# EAGLE board Pacman2-OSH-panels (EAGLE 9.2.2)
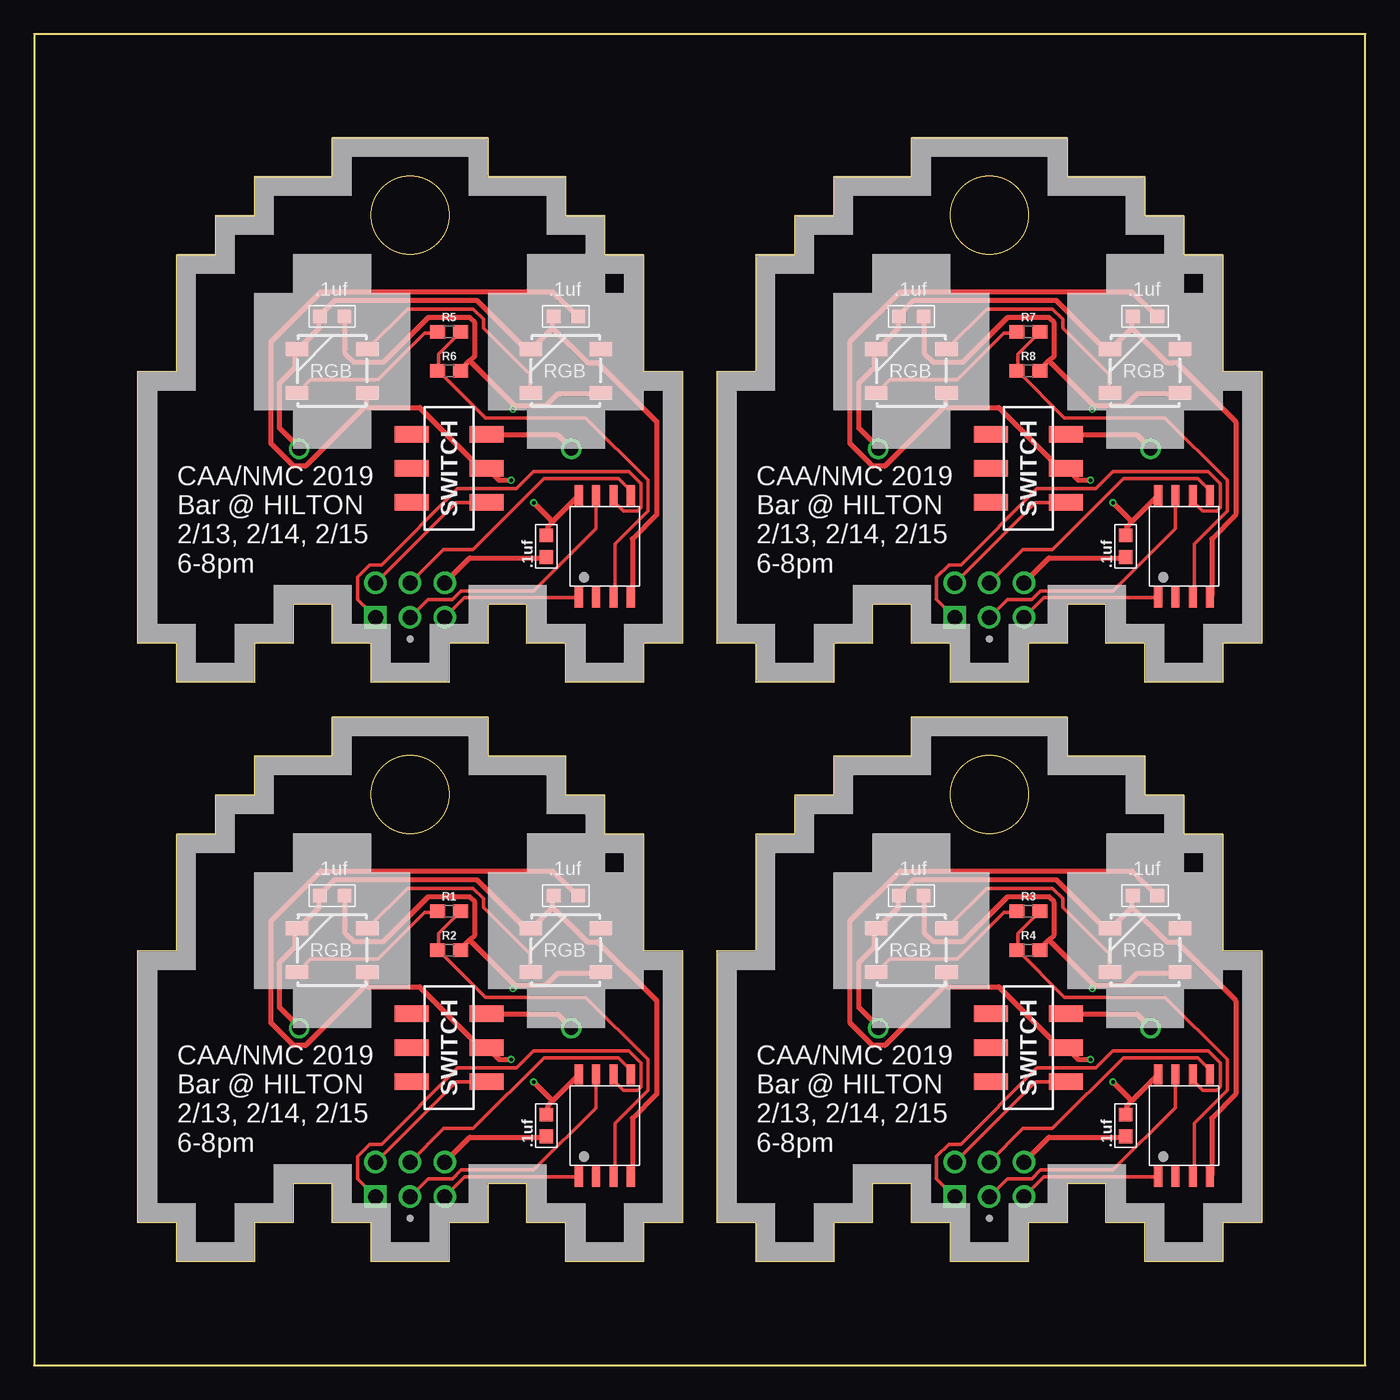
[diagram p0: board, top side]
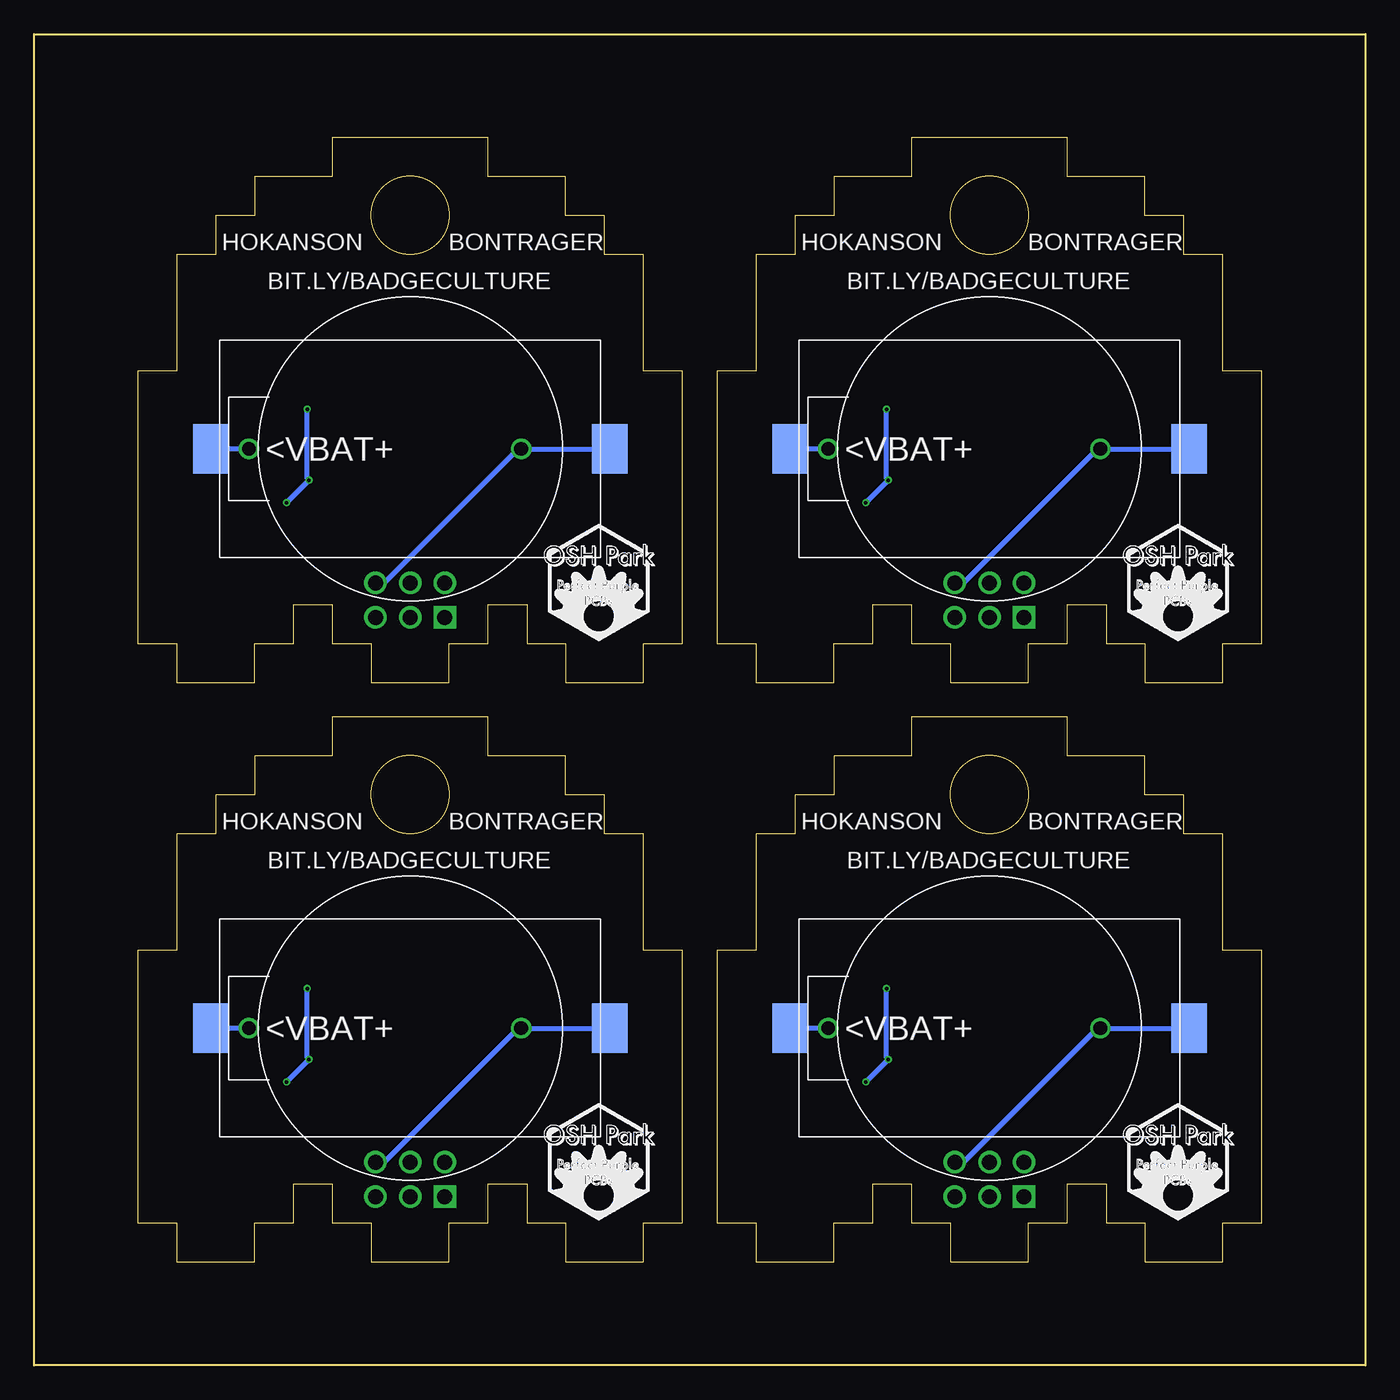
[diagram p1: board, bottom side, seen from below]

Size 97.79 x 97.79 mm. Coordinates in mm from the lower left corner, seen from the top.
Outline: 47.62,10.48 44.76,10.48 44.76,7.62 39.05,7.62 39.05,10.48 36.19,10.48 36.19,13.33 33.33,13.33 33.33,10.48 30.48,10.48 30.48,7.62 24.76,7.62 24.76,10.48 21.91,10.48 21.91,13.33 19.05,13.33 19.05,10.48 16.19,10.48 16.19,7.62 10.48,7.62 10.48,10.48 7.62,10.48 7.62,30.48 10.48,30.48 10.48,39.05 13.33,39.05 13.33,41.91 16.19,41.91 16.19,44.76 21.91,44.76 21.91,47.62 33.33,47.62 33.33,44.76 39.05,44.76 39.05,41.91 41.91,41.91 41.91,39.05 44.76,39.05 44.76,30.48 47.62,30.48 47.62,10.48
Outline: 90.17,10.48 87.31,10.48 87.31,7.62 81.59,7.62 81.59,10.48 78.74,10.48 78.74,13.33 75.88,13.33 75.88,10.48 73.02,10.48 73.02,7.62 67.31,7.62 67.31,10.48 64.45,10.48 64.45,13.33 61.59,13.33 61.59,10.48 58.74,10.48 58.74,7.62 53.02,7.62 53.02,10.48 50.16,10.48 50.16,30.48 53.02,30.48 53.02,39.05 55.88,39.05 55.88,41.91 58.74,41.91 58.74,44.76 64.45,44.76 64.45,47.62 75.88,47.62 75.88,44.76 81.59,44.76 81.59,41.91 84.45,41.91 84.45,39.05 87.31,39.05 87.31,30.48 90.17,30.48 90.17,10.48
Outline: 47.62,53.02 44.76,53.02 44.76,50.16 39.05,50.16 39.05,53.02 36.19,53.02 36.19,55.88 33.33,55.88 33.33,53.02 30.48,53.02 30.48,50.16 24.76,50.16 24.76,53.02 21.91,53.02 21.91,55.88 19.05,55.88 19.05,53.02 16.19,53.02 16.19,50.16 10.48,50.16 10.48,53.02 7.62,53.02 7.62,73.02 10.48,73.02 10.48,81.59 13.33,81.59 13.33,84.45 16.19,84.45 16.19,87.31 21.91,87.31 21.91,90.17 33.33,90.17 33.33,87.31 39.05,87.31 39.05,84.45 41.91,84.45 41.91,81.59 44.76,81.59 44.76,73.02 47.62,73.02 47.62,53.02
Outline: 90.17,53.02 87.31,53.02 87.31,50.16 81.59,50.16 81.59,53.02 78.74,53.02 78.74,55.88 75.88,55.88 75.88,53.02 73.02,53.02 73.02,50.16 67.31,50.16 67.31,53.02 64.45,53.02 64.45,55.88 61.59,55.88 61.59,53.02 58.74,53.02 58.74,50.16 53.02,50.16 53.02,53.02 50.16,53.02 50.16,73.02 53.02,73.02 53.02,81.59 55.88,81.59 55.88,84.45 58.74,84.45 58.74,87.31 64.45,87.31 64.45,90.17 75.88,90.17 75.88,87.31 81.59,87.31 81.59,84.45 84.45,84.45 84.45,81.59 87.31,81.59 87.31,73.02 90.17,73.02 90.17,53.02
Outline: 0,0 97.79,0 97.79,97.79 0,97.79 0,0
Outline: circle at 27.62,41.94 radius 2.86
Outline: circle at 70.17,41.94 radius 2.86
Outline: circle at 27.62,84.48 radius 2.86
Outline: circle at 70.17,84.48 radius 2.86
Copper layers (1*16): Top 0.035559375mm / dielectric 1.6mm / Bottom 0.035559375mm
Design rules "oshpark-2layer": minimum track width 6mil, minimum drill 10mil, track to track 6mil, track to pad 6mil, pad to pad 6mil, via to via 6mil, smd to smd 6mil, copper to edge 15mil, drill to drill 6mil, minimum pad ring 5mil, minimum via ring 5mil, stop-mask expansion 2.5mil, vias tented up to drill 0mil, thermal gap 10mil
Net classes: 0 default: width 0.254 mm, clearance 0.254 mm; 1 VCC: width 0.381 mm, clearance 0.254 mm; 2 GND: width 0.381 mm, clearance 0.254 mm; 3 VBAT: width 0.381 mm, clearance 0.254 mm

## Footprints (pad centres in the part's own frame; a part is rotated, then mirrored left to right if it is on the bottom)
WS2812B = smd 1 x 1: CAP1 -0.9,4; CAP2 0.9,4 | smd 1.651 x 1: DI -2.577,-1.6; DO 2.577,1.6; GND -2.577,1.6; VCC 2.577,-1.6
0603-CAP = smd 1 x 1: CAP1 -0.8,0; CAP2 0.8,0
SOT127P798X216-8N = smd 1.5 x 0.6: GND -3.75,-1.905; PB0 3.75,-1.905; PB1 3.75,-0.635; PB2 3.75,0.635; PB3 -3.75,0.635; PB4 -3.75,-0.635; PB5 -3.75,1.905; VCC 3.75,1.905
ICSP-LO-SILK = drill 1.1 pad 1.65: 0/MOSI/SDA 0,1.27; 2/SCK/SCL 0,3.81; 5/RST -2.54,3.81; GND -2.54,1.27; VCC 2.54,1.27 | drill 1.1 pad 1.65 square: 1/MISO 2.54,3.81
0603 = smd 1.1 x 1: 1 -0.85,0; 2 0.85,0
SMT-SWITCH = smd 1.2 x 2.5: 1 -2.5,-2.75; 2 0,-2.75; 3 2.5,-2.75; 4 -2.5,2.75; 5 0,2.75; 6 2.5,2.75
SMT-CR-HOLDER = smd 2.6 x 3.65: GND 14.65,0; VBAT -14.65,0
THRU-CR-HOLDER = drill 1: GND 8.15,0; VBAT -11.85,0

## Placement (x,y rotation side)
D1  WS2812B  [WS2812B]  21.9,30.5 0 top
D2  WS2812B  [WS2812B]  39.06,30.5 0 top
D3  WS2812B  [WS2812B]  64.44,30.5 0 top
D4  WS2812B  [WS2812B]  81.61,30.5 0 top
D5  WS2812B  [WS2812B]  21.9,73.05 0 top
D6  WS2812B  [WS2812B]  39.06,73.05 0 top
D7  WS2812B  [WS2812B]  64.44,73.05 0 top
D8  WS2812B  [WS2812B]  81.61,73.05 0 top
DECOUPLER  .1uf  [0603-CAP]  37.63,17.63 90 top
DECOUPLER1  .1uf  [0603-CAP]  80.17,17.63 90 top
DECOUPLER2  .1uf  [0603-CAP]  37.63,60.17 90 top
DECOUPLER3  .1uf  [0603-CAP]  80.17,60.17 90 top
IC1  ATTINY85-20SU  [SOT127P798X216-8N]  41.92,17.63 90 top
IC2  ATTINY85-20SU  [SOT127P798X216-8N]  84.47,17.63 90 top
IC3  ATTINY85-20SU  [SOT127P798X216-8N]  41.92,60.17 90 top
IC4  ATTINY85-20SU  [SOT127P798X216-8N]  84.47,60.17 90 top
J1  ICSP-LO-SILK  [ICSP-LO-SILK]  70.17,16.2 180 top
J2  ICSP-LO-SILK  [ICSP-LO-SILK]  27.62,16.2 180 top
J3  ICSP-LO-SILK  [ICSP-LO-SILK]  27.62,58.74 180 top
J4  ICSP-LO-SILK  [ICSP-LO-SILK]  70.17,58.74 180 top
R1  470  [0603]  30.48,33.36 0 top
R2  10k  [0603]  30.48,30.5 0 top
R3  470  [0603]  73.03,33.36 0 top
R4  10k  [0603]  73.03,30.5 0 top
R5  470  [0603]  30.48,75.91 0 top
R6  10k  [0603]  30.48,73.05 0 top
R7  470  [0603]  73.03,75.91 0 top
R8  10k  [0603]  73.03,73.05 0 top
U$1  SMT-SWITCH  [SMT-SWITCH]  73.03,23.35 270 top
U$2  SMT-BATTERY-HOLDER  [SMT-CR-HOLDER]  27.62,24.78 0 bottom
U$3  THRU-CR-HOLDER  [THRU-CR-HOLDER]  27.62,24.78 0 bottom
U$4  SMT-BATTERY-HOLDER  [SMT-CR-HOLDER]  70.17,24.78 0 bottom
U$5  [OSHPARK_LOGOHEX]  17.88,10.6 0 bottom
U$6  THRU-CR-HOLDER  [THRU-CR-HOLDER]  70.17,24.78 0 bottom
U$7  [OSHPARK_LOGOHEX]  60.42,10.6 0 bottom
U$8  SMT-SWITCH  [SMT-SWITCH]  30.48,65.89 270 top
U$9  SMT-BATTERY-HOLDER  [SMT-CR-HOLDER]  27.62,67.33 0 bottom
U$10  THRU-CR-HOLDER  [THRU-CR-HOLDER]  27.62,67.33 0 bottom
U$11  [OSHPARK_LOGOHEX]  17.88,53.15 0 bottom
U$12  SMT-SWITCH  [SMT-SWITCH]  73.03,65.89 270 top
U$13  SMT-BATTERY-HOLDER  [SMT-CR-HOLDER]  70.17,67.33 0 bottom
U$14  THRU-CR-HOLDER  [THRU-CR-HOLDER]  70.17,67.33 0 bottom
U$15  [OSHPARK_LOGOHEX]  60.42,53.15 0 bottom
U$145  SMT-SWITCH  [SMT-SWITCH]  30.48,23.35 270 top

## Library data of the parts
D1-D8 = BadgeParts; PROD_ID: DIO-12503
DECOUPLER DECOUPLER1-DECOUPLER3 J1-J4 U$1-U$4 U$6 U$8-U$10 U$12-U$14 U$145 = BadgeParts
IC1-IC4 = BadgeParts; ARROW_PART_NUMBER: ATTINY85-20SU; ARROW_PRICE/STOCK: https://www.arrow.com/en/products/attiny85-20su/microchip-technology; DESCRIPTION: MICROCHIP - ATTINY85-20SU - MICROCONTROLLER MCU, 8 BIT, ATTINY, 20MHZ, SOIC-8; HEIGHT: 2.16mm; MANUFACTURER_NAME: Microchip; MANUFACTURER_PART_NUMBER: ATTINY85-20SU; RS_PART_NUMBER: 1331674; RS_PRICE/STOCK: http://uk.rs-online.com/web/p/products/1331674
R1 R3 R5 R7 = SparkFun-Resistors; PROD_ID: RES-07869
R2 R4 R6 R8 = SparkFun-Resistors; PROD_ID: RES-00824
U$5 U$7 U$11 U$15 = NickParts

## Nets
GND [GND]: D1.CAP1 D1.GND D2.CAP1 D2.GND DECOUPLER.CAP1 IC1.GND J2.GND U$2.GND U$3.GND
GND1 [GND]: D3.CAP1 D3.GND D4.CAP1 D4.GND DECOUPLER1.CAP1 IC2.GND J1.GND U$4.GND U$6.GND
GND2 [GND]: D5.CAP1 D5.GND D6.CAP1 D6.GND DECOUPLER2.CAP1 IC3.GND J3.GND U$9.GND U$10.GND
GND3 [GND]: D7.CAP1 D7.GND D8.CAP1 D8.GND DECOUPLER3.CAP1 IC4.GND J4.GND U$13.GND U$14.GND
N$1: D3.DO D4.DI
N$2: D3.DI R3.1
N$3: D1.DO D2.DI
N$4: D5.DO D6.DI
N$5: D1.DI R1.1
N$6: D5.DI R5.1
N$7: D7.DO D8.DI
N$8: D7.DI R7.1
PB0: IC1.PB0 J2.0/MOSI/SDA
PB1: IC1.PB1 J2.1/MISO
PB2: IC1.PB2 J2.2/SCK/SCL
PB3: IC1.PB3
PB4: IC1.PB4 R1.2 R2.1
PB5: IC1.PB5 J2.5/RST
PB6: IC2.PB0 J1.0/MOSI/SDA
PB7: IC2.PB3
PB8: IC2.PB4 R3.2 R4.1
PB9: IC2.PB2 J1.2/SCK/SCL
PB10: IC2.PB5 J1.5/RST
PB11: IC2.PB1 J1.1/MISO
PB12: IC3.PB0 J3.0/MOSI/SDA
PB13: IC3.PB3
PB14: IC3.PB4 R5.2 R6.1
PB15: IC3.PB2 J3.2/SCK/SCL
PB16: IC3.PB5 J3.5/RST
PB17: IC3.PB1 J3.1/MISO
PB18: IC4.PB0 J4.0/MOSI/SDA
PB19: IC4.PB3
PB20: IC4.PB4 R7.2 R8.1
PB21: IC4.PB2 J4.2/SCK/SCL
PB22: IC4.PB5 J4.5/RST
PB23: IC4.PB1 J4.1/MISO
VBAT [VBAT]: U$2.VBAT U$3.VBAT U$145.4
VBAT1 [VBAT]: U$1.4 U$4.VBAT U$6.VBAT
VBAT2 [VBAT]: U$8.4 U$9.VBAT U$10.VBAT
VBAT3 [VBAT]: U$12.4 U$13.VBAT U$14.VBAT
VCC [VCC]: D1.CAP2 D1.VCC D2.CAP2 D2.VCC DECOUPLER.CAP2 IC1.VCC R2.2 U$145.5
VCC1 [VCC]: D3.CAP2 D3.VCC D4.CAP2 D4.VCC DECOUPLER1.CAP2 IC2.VCC R4.2 U$1.5
VCC2 [VCC]: D5.CAP2 D5.VCC D6.CAP2 D6.VCC DECOUPLER2.CAP2 IC3.VCC R6.2 U$8.5
VCC3 [VCC]: D7.CAP2 D7.VCC D8.CAP2 D8.VCC DECOUPLER3.CAP2 IC4.VCC R8.2 U$12.5
VUSB: J2.VCC U$145.6
VUSB1: J1.VCC U$1.6
VUSB2: J3.VCC U$8.6
VUSB3: J4.VCC U$12.6

## Tracks (layer width: path | path; a pad name or v marks a point on that pad's centre or on a via)
GND
  Top 0.381: 38.1,33.66 38.1,34.42 D2.CAP1 | 38.1,33.66 36.58,32.13 D2.GND 36.32,32.13 36.07,32.13 32.51,35.69 22.1,35.69 21.08,34.67 D1.CAP1 20.95,34.42 20.95,33.66 19.43,32.13 D1.GND 19.18,32 19.18,30.73 18.03,29.59 18.03,26.29 19.43,24.89 U$3.GND | 38.1,33.66 40.64,31.11 41.4,31.11 45.72,26.8 45.72,19.94 43.94,18.16 43.94,13.97 IC1.GND | DECOUPLER.CAP1 37.59,16.76 32,16.76 30.23,14.99 J2.GND
  Bottom 0.381: U$2.GND 13.08,24.77 19.43,24.77 U$3.GND 19.56,24.89 29.46,14.99 30.1,14.99 J2.GND
GND1
  Top 0.381: 80.64,33.66 80.64,34.42 D4.CAP1 | 80.64,33.66 79.12,32.13 D4.GND 78.87,32.13 78.61,32.13 75.06,35.69 64.64,35.69 63.63,34.67 D3.CAP1 63.5,34.42 63.5,33.66 61.98,32.13 D3.GND 61.72,32 61.72,30.73 60.58,29.59 60.58,26.29 61.98,24.89 U$6.GND | 80.64,33.66 83.19,31.11 83.95,31.11 88.27,26.8 88.27,19.94 86.49,18.16 86.49,13.97 IC2.GND | DECOUPLER1.CAP1 80.14,16.76 74.55,16.76 72.77,14.99 J1.GND
  Bottom 0.381: U$4.GND 55.63,24.77 61.98,24.77 U$6.GND 62.1,24.89 72.01,14.99 72.64,14.99 J1.GND
GND2
  Top 0.381: 38.1,76.2 38.1,76.96 D6.CAP1 | 38.1,76.2 36.58,74.68 D6.GND 36.32,74.68 36.07,74.68 32.51,78.23 22.1,78.23 21.08,77.22 D5.CAP1 20.95,76.96 20.95,76.2 19.43,74.68 D5.GND 19.18,74.55 19.18,73.28 18.03,72.14 18.03,68.83 19.43,67.44 U$10.GND | 38.1,76.2 40.64,73.66 41.4,73.66 45.72,69.34 45.72,62.48 43.94,60.71 43.94,56.52 IC3.GND | DECOUPLER2.CAP1 37.59,59.31 32,59.31 30.23,57.53 J3.GND
  Bottom 0.381: U$9.GND 13.08,67.31 19.43,67.31 U$10.GND 19.56,67.44 29.46,57.53 30.1,57.53 J3.GND
GND3
  Top 0.381: 80.64,76.2 80.64,76.96 D8.CAP1 | 80.64,76.2 79.12,74.68 D8.GND 78.87,74.68 78.61,74.68 75.06,78.23 64.64,78.23 63.63,77.22 D7.CAP1 63.5,76.96 63.5,76.2 61.98,74.68 D7.GND 61.72,74.55 61.72,73.28 60.58,72.14 60.58,68.83 61.98,67.44 U$14.GND | 80.64,76.2 83.19,73.66 83.95,73.66 88.27,69.34 88.27,62.48 86.49,60.71 86.49,56.52 IC4.GND | DECOUPLER3.CAP1 80.14,59.31 74.55,59.31 72.77,57.53 J4.GND
  Bottom 0.381: U$13.GND 55.63,67.31 61.98,67.31 U$14.GND 62.1,67.44 72.01,57.53 72.64,57.53 J4.GND
N$1
  Top 0.254: D4.DI 78.99,28.96 78.99,30.23 75.56,33.66 75.56,34.29 74.8,35.05 69.98,35.05 67.06,32.13 D3.DO
N$2
  Top 0.254: R3.1 72.14,33.27 71.25,33.27 67.82,29.84 62.87,29.84 61.98,28.96 D3.DI
N$3
  Top 0.254: D2.DI 36.45,28.96 36.45,30.23 33.02,33.66 33.02,34.29 32.26,35.05 27.43,35.05 24.51,32.13 D1.DO
N$4
  Top 0.254: D6.DI 36.45,71.5 36.45,72.77 33.02,76.2 33.02,76.83 32.26,77.6 27.43,77.6 24.51,74.68 D5.DO
N$5
  Top 0.254: R1.1 29.59,33.27 28.7,33.27 25.27,29.84 20.32,29.84 19.43,28.96 D1.DI
N$6
  Top 0.254: R5.1 29.59,75.82 28.7,75.82 25.27,72.39 20.32,72.39 19.43,71.5 D5.DI
N$7
  Top 0.254: D8.DI 78.99,71.5 78.99,72.77 75.56,76.2 75.56,76.83 74.8,77.6 69.98,77.6 67.06,74.68 D7.DO
N$8
  Top 0.254: R7.1 72.14,75.82 71.25,75.82 67.82,72.39 62.87,72.39 61.98,71.5 D7.DI
PB0
  Top 0.254: IC1.PB0 43.81,21.46 43.81,21.72 42.93,22.61 37.47,22.61 32.26,17.4 30.1,17.4 27.69,14.99 J2.0/MOSI/SDA
PB1
  Top 0.254: IC1.PB1 42.67,21.34 42.67,20.83 43.31,20.19 44.32,20.19 44.58,20.45 44.58,22.23 43.69,23.11 36.7,23.11 35.43,21.84 31.11,21.84 25.53,16.26 24.64,16.26 23.75,15.37 23.75,13.72 25.02,12.45 J2.1/MISO
PB2
  Top 0.254: IC1.PB2 41.27,21.34 41.27,18.92 36.7,14.35 31.37,14.35 30.73,13.72 28.96,13.72 27.69,12.45 J2.2/SCK/SCL
PB4
  Top 0.254: R1.2 31.24,33.27 29.72,31.75 29.72,30.61 R2.1 29.72,30.48 33.15,27.05 40.51,27.05 45.09,22.48 45.09,20.19 42.67,17.78 42.67,13.97 IC1.PB4
PB5
  Top 0.254: IC1.PB5 40.01,13.84 31.62,13.84 30.23,12.45 J2.5/RST
PB6
  Top 0.254: IC2.PB0 86.36,21.46 86.36,21.72 85.47,22.61 80.01,22.61 74.8,17.4 72.64,17.4 70.23,14.99 J1.0/MOSI/SDA
PB8
  Top 0.254: R3.2 73.79,33.27 72.26,31.75 72.26,30.61 R4.1 72.26,30.48 75.69,27.05 83.06,27.05 87.63,22.48 87.63,20.19 85.22,17.78 85.22,13.97 IC2.PB4
PB9
  Top 0.254: IC2.PB2 83.82,21.34 83.82,18.92 79.25,14.35 73.91,14.35 73.28,13.72 71.5,13.72 70.23,12.45 J1.2/SCK/SCL
PB10
  Top 0.254: IC2.PB5 82.55,13.84 74.17,13.84 72.77,12.45 J1.5/RST
PB11
  Top 0.254: IC2.PB1 85.22,21.34 85.22,20.83 85.85,20.19 86.87,20.19 87.12,20.45 87.12,22.23 86.23,23.11 79.25,23.11 77.98,21.84 73.66,21.84 68.07,16.26 67.18,16.26 66.29,15.37 66.29,13.72 67.56,12.45 J1.1/MISO
PB12
  Top 0.254: IC3.PB0 43.81,64.01 43.81,64.26 42.93,65.15 37.47,65.15 32.26,59.94 30.1,59.94 27.69,57.53 J3.0/MOSI/SDA
PB14
  Top 0.254: R5.2 31.24,75.82 29.72,74.3 29.72,73.15 R6.1 29.72,73.03 33.15,69.6 40.51,69.6 45.09,65.02 45.09,62.74 42.67,60.33 42.67,56.52 IC3.PB4
PB15
  Top 0.254: IC3.PB2 41.27,63.88 41.27,61.47 36.7,56.9 31.37,56.9 30.73,56.26 28.96,56.26 27.69,54.99 J3.2/SCK/SCL
PB16
  Top 0.254: IC3.PB5 40.01,56.39 31.62,56.39 30.23,54.99 J3.5/RST
PB17
  Top 0.254: IC3.PB1 42.67,63.88 42.67,63.37 43.31,62.74 44.32,62.74 44.58,62.99 44.58,64.77 43.69,65.66 36.7,65.66 35.43,64.39 31.11,64.39 25.53,58.8 24.64,58.8 23.75,57.91 23.75,56.26 25.02,54.99 J3.1/MISO
PB18
  Top 0.254: IC4.PB0 86.36,64.01 86.36,64.26 85.47,65.15 80.01,65.15 74.8,59.94 72.64,59.94 70.23,57.53 J4.0/MOSI/SDA
PB20
  Top 0.254: R7.2 73.79,75.82 72.26,74.3 72.26,73.15 R8.1 72.26,73.03 75.69,69.6 83.06,69.6 87.63,65.02 87.63,62.74 85.22,60.33 85.22,56.52 IC4.PB4
PB21
  Top 0.254: IC4.PB2 83.82,63.88 83.82,61.47 79.25,56.9 73.91,56.9 73.28,56.26 71.5,56.26 70.23,54.99 J4.2/SCK/SCL
PB22
  Top 0.254: IC4.PB5 82.55,56.39 74.17,56.39 72.77,54.99 J4.5/RST
PB23
  Top 0.254: IC4.PB1 85.22,63.88 85.22,63.37 85.85,62.74 86.87,62.74 87.12,62.99 87.12,64.77 86.23,65.66 79.25,65.66 77.98,64.39 73.66,64.39 68.07,58.8 67.18,58.8 66.29,57.91 66.29,56.26 67.56,54.99 J4.1/MISO
VBAT
  Top 0.381: U$145.4 33.27,25.78 38.48,25.78 39.37,24.89 U$3.VBAT
  Bottom 0.381: U$2.VBAT 42.16,24.77 39.5,24.77 U$3.VBAT
VBAT1
  Top 0.381: U$1.4 75.82,25.78 81.03,25.78 81.92,24.89 U$6.VBAT
  Bottom 0.381: U$4.VBAT 84.71,24.77 82.04,24.77 U$6.VBAT
VBAT2
  Top 0.381: U$8.4 33.27,68.33 38.48,68.33 39.37,67.44 U$10.VBAT
  Bottom 0.381: U$9.VBAT 42.16,67.31 39.5,67.31 U$10.VBAT
VBAT3
  Top 0.381: U$12.4 75.82,68.33 81.03,68.33 81.92,67.44 U$14.VBAT
  Bottom 0.381: U$13.VBAT 84.71,67.31 82.04,67.31 U$14.VBAT
VCC  (via drill 0.25)
  Top 0.381: 32,31.24 31.37,30.61 R2.2 | 32,31.24 32.38,31.62 32.38,34.04 32,34.42 28.96,34.42 25.65,31.11 23.5,31.11 22.86,31.75 22.86,34.42 D1.CAP2 | 35.31,27.94 37.59,27.94 38.48,28.83 41.53,28.83 D2.VCC | 32,31.24 35.31,27.94 | 38.1,19.43 40.01,21.34 IC1.VCC | 38.1,19.43 37.72,19.05 37.72,18.54 DECOUPLER.CAP2 | 24.38,27.94 19.94,23.5 19.05,23.5 17.4,25.15 17.4,32.64 21.08,36.32 38.1,36.32 39.88,34.54 D2.CAP2 | 24.38,27.94 24.38,28.83 D1.VCC | 24.38,27.94 24.51,27.81 28.32,27.81 32.77,23.37 33.15,23.37 U$145.5 33.4,23.24 34.16,22.48 v35.05,22.48 | v36.7,20.83 38.1,19.43 | v35.18,27.69 35.18,27.81 35.31,27.94
  Bottom 0.381: v36.7,20.83 v35.05,22.48 35.18,22.61 v35.18,27.69
VCC1  (via drill 0.25)
  Top 0.381: 74.55,31.24 73.91,30.61 R4.2 | 74.55,31.24 74.93,31.62 74.93,34.04 74.55,34.42 71.5,34.42 68.2,31.11 66.04,31.11 65.41,31.75 65.41,34.42 D3.CAP2 | 77.85,27.94 80.14,27.94 81.03,28.83 84.07,28.83 D4.VCC | 74.55,31.24 77.85,27.94 | 80.64,19.43 82.55,21.34 IC2.VCC | 80.64,19.43 80.26,19.05 80.26,18.54 DECOUPLER1.CAP2 | 66.93,27.94 62.48,23.5 61.59,23.5 59.94,25.15 59.94,32.64 63.63,36.32 80.64,36.32 82.42,34.54 D4.CAP2 | 66.93,27.94 66.93,28.83 D3.VCC | 66.93,27.94 67.06,27.81 70.87,27.81 75.31,23.37 75.69,23.37 U$1.5 75.95,23.24 76.71,22.48 v77.6,22.48 | v79.25,20.83 80.64,19.43 | v77.72,27.69 77.72,27.81 77.85,27.94
  Bottom 0.381: v79.25,20.83 v77.6,22.48 77.72,22.61 v77.72,27.69
VCC2  (via drill 0.25)
  Top 0.381: 32,73.79 31.37,73.15 R6.2 | 32,73.79 32.38,74.17 32.38,76.58 32,76.96 28.96,76.96 25.65,73.66 23.5,73.66 22.86,74.3 22.86,76.96 D5.CAP2 | 35.31,70.48 37.59,70.48 38.48,71.37 41.53,71.37 D6.VCC | 32,73.79 35.31,70.48 | 38.1,61.98 40.01,63.88 IC3.VCC | 38.1,61.98 37.72,61.59 37.72,61.09 DECOUPLER2.CAP2 | 24.38,70.48 19.94,66.04 19.05,66.04 17.4,67.69 17.4,75.18 21.08,78.87 38.1,78.87 39.88,77.09 D6.CAP2 | 24.38,70.48 24.38,71.37 D5.VCC | 24.38,70.48 24.51,70.36 28.32,70.36 32.77,65.91 33.15,65.91 U$8.5 33.4,65.79 34.16,65.02 v35.05,65.02 | v36.7,63.37 38.1,61.98 | v35.18,70.23 35.18,70.36 35.31,70.48
  Bottom 0.381: v36.7,63.37 v35.05,65.02 35.18,65.15 v35.18,70.23
VCC3  (via drill 0.25)
  Top 0.381: 74.55,73.79 73.91,73.15 R8.2 | 74.55,73.79 74.93,74.17 74.93,76.58 74.55,76.96 71.5,76.96 68.2,73.66 66.04,73.66 65.41,74.3 65.41,76.96 D7.CAP2 | 77.85,70.48 80.14,70.48 81.03,71.37 84.07,71.37 D8.VCC | 74.55,73.79 77.85,70.48 | 80.64,61.98 82.55,63.88 IC4.VCC | 80.64,61.98 80.26,61.59 80.26,61.09 DECOUPLER3.CAP2 | 66.93,70.48 62.48,66.04 61.59,66.04 59.94,67.69 59.94,75.18 63.63,78.87 80.64,78.87 82.42,77.09 D8.CAP2 | 66.93,70.48 66.93,71.37 D7.VCC | 66.93,70.48 67.06,70.36 70.87,70.36 75.31,65.91 75.69,65.91 U$12.5 75.95,65.79 76.71,65.02 v77.6,65.02 | v79.25,63.37 80.64,61.98 | v77.72,70.23 77.72,70.36 77.85,70.48
  Bottom 0.381: v79.25,63.37 v77.6,65.02 77.72,65.15 v77.72,70.23
VUSB
  Top 0.254: U$145.6 33.15,20.83 30.99,20.83 25.15,14.99 J2.VCC
VUSB1
  Top 0.254: U$1.6 75.69,20.83 73.53,20.83 67.69,14.99 J1.VCC
VUSB2
  Top 0.254: U$8.6 33.15,63.37 30.99,63.37 25.15,57.53 J3.VCC
VUSB3
  Top 0.254: U$12.6 75.69,63.37 73.53,63.37 67.69,57.53 J4.VCC

## Text on the board
tPlace: CAA/NMC 2019 / Bar @ HILTON / 2/13, 2/14, 2/15 / 6-8pm | CAA/NMC 2019 / Bar @ HILTON / 2/13, 2/14, 2/15 / 6-8pm | CAA/NMC 2019 / Bar @ HILTON / 2/13, 2/14, 2/15 / 6-8pm | CAA/NMC 2019 / Bar @ HILTON / 2/13, 2/14, 2/15 / 6-8pm
bPlace: BONTRAGER | HOKANSON | BONTRAGER | HOKANSON | BIT.LY/BADGECULTURE | BIT.LY/BADGECULTURE | BONTRAGER | HOKANSON | BONTRAGER | HOKANSON | BIT.LY/BADGECULTURE | BIT.LY/BADGECULTURE